# Altium PCB PowerDistribution.PcbDoc (part 2 of 3)
Units mm, origin at the board's own origin, x right, y up, seen from the top; angles counter-clockwise.
Board outline 120 x 100 mm, 4 copper layers (Component Side, Ground, Power, Solder Side), stack 0.844 mm thick; 193 components, 120 nets, 734 pads, 6 vias.
Unrouted connection lines stored in the file: 508.
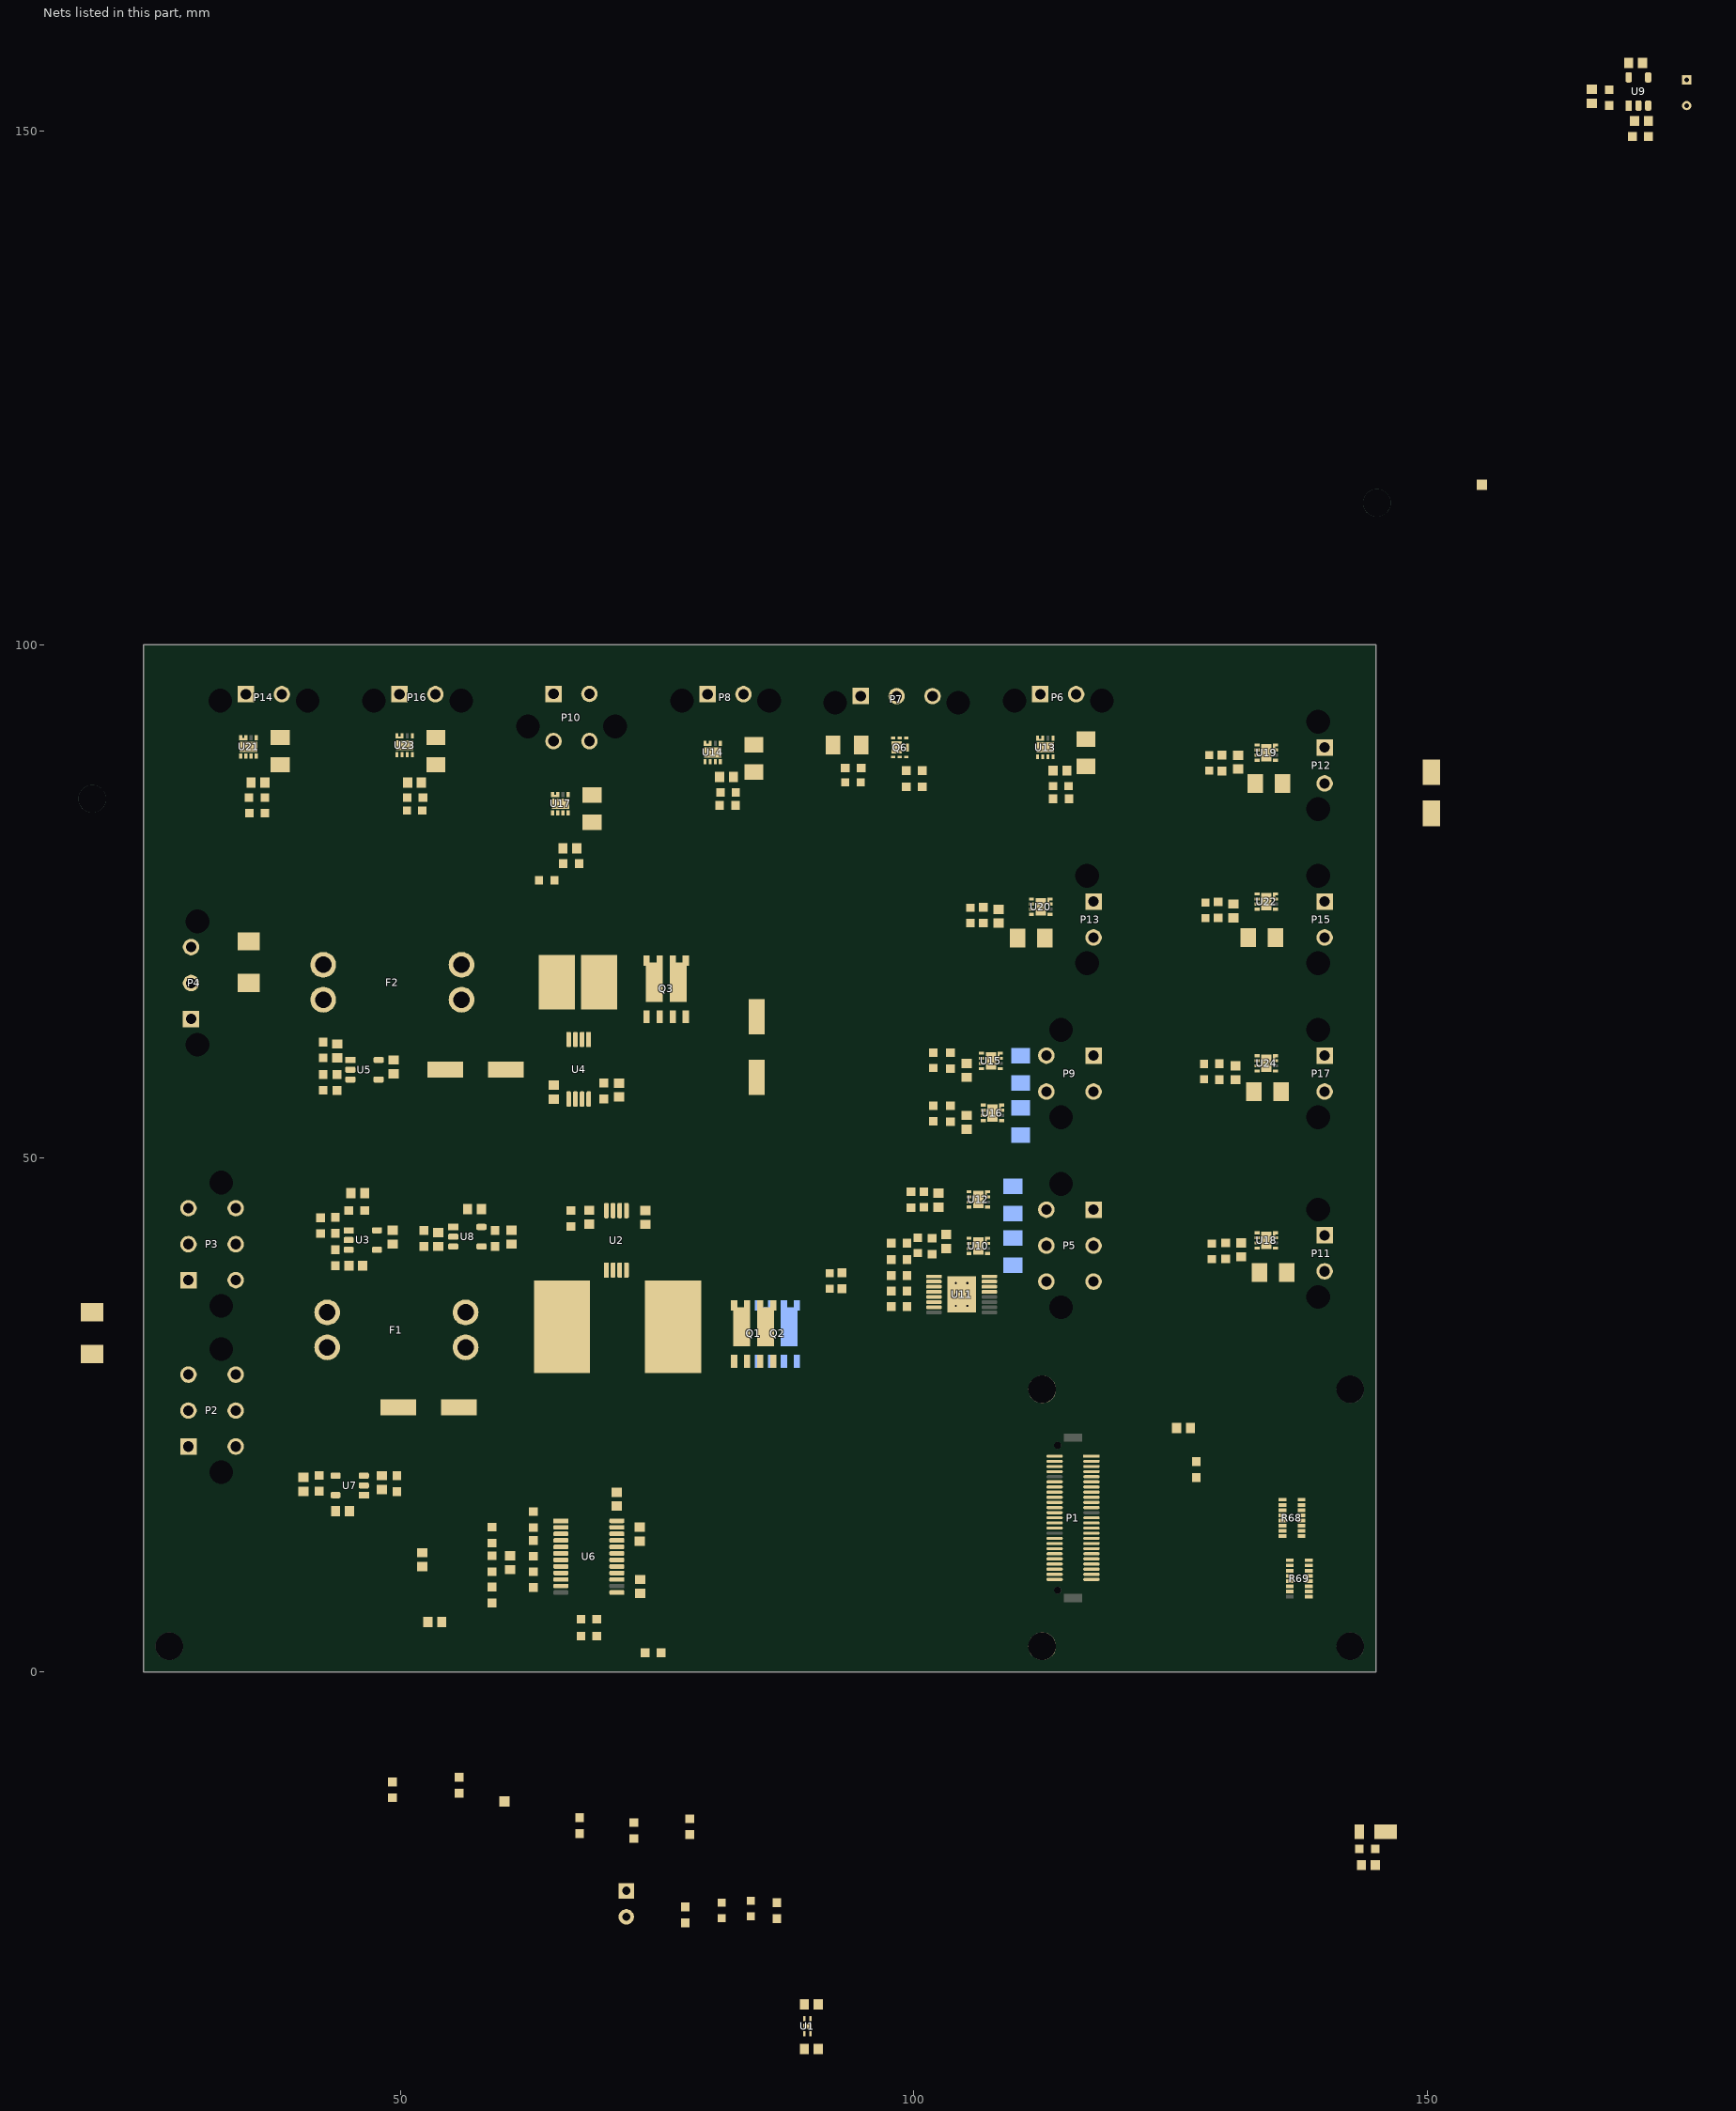
[diagram p2: the nets of this part, all layers, seen from the top]

## Part data (continued)
C17: library part "CAP CER 0.068UF 10% 50V X7R 0603", "0.068µF 50V Ceramic Capacitor X7R 0603 (1608 Metric) 0.063\" L x 0.032\" W (1.60mm x 0.80mm)", Case/Package=0603, Case Code (Metric)=1608, Dielectric=X7R, Manufacturer=Murata, Manufacturer Part Number=GCM188R71H683KA57D, Max Operating Temperature=125°C, Min Operating Temperature=-55°C, Package Quantity=4000, Supplier Part Number 1=490-8027-1-ND, Tolerance=10%, Voltage Rating=50V, Capacitance=68nF, Case Code (Imperial)=0603, ComponentLink1Description=https://datasheet.ciiva.com/29542/s0717e-29542427.pdf, ComponentLink1URL=https://datasheet.ciiva.com/29542/s0717e-29542427.pdf, ComponentLink2Description=https://datasheet.ciiva.com/29542/s0717e-29542428.pdf, ComponentLink2URL=https://datasheet.ciiva.com/29542/s0717e-29542428.pdf, ComponentLink3Description=https://datasheet.ciiva.com/29542/s0717e-29542429.pdf, ComponentLink3URL=https://datasheet.ciiva.com/29542/s0717e-29542429.pdf, Depth=0.8mm, Height=0.8mm, Length=1.6mm, Mount="Surface Mount", Packaging="Tape and Reel", Pricing 1="1=0.16, 10=0.116, 100=0.0547, 500=0.03832, 1000=0.03172 (USD)", Radiation Hardening=No, Stock 1=40000, Supplier 1=Digi-Key, Termination=SMD/SMT, Thickness=0.035inch, Voltage Rating (DC)=50V, Width=0.031inch
C18: library part "CAP ALUM 100UF 20% 35V SMD", "100µF 35V Aluminum Electrolytic Capacitors Radial, Can - SMD 2000 Hrs @ 85°C", Capacitance=100uF, Case/Package=Radial, Leakage Current=3uA, Manufacturer 1=Panasonic, Manufacturer Part Number 1=EEE-1VA101XP, Max Operating Temperature=85°C, Min Operating Temperature=-40°C, Package Quantity=900, Ripple Current=132mA, Supplier Part Number 1=PCE3951CT-ND, Tolerance=20%, Voltage=35V, ComponentLink1Description=https://datasheet.ciiva.com/46378/aba0000ce2-46378341.pdf, ComponentLink1URL=https://datasheet.ciiva.com/46378/aba0000ce2-46378341.pdf, ComponentLink2Description=https://datasheet.ciiva.com/17535/aba0000ce2-17535510.pdf, ComponentLink2URL=https://datasheet.ciiva.com/17535/aba0000ce2-17535510.pdf, ComponentLink3Description=https://datasheet.ciiva.com/30170/11aba0000ce2-30170103.pdf, ComponentLink3URL=https://datasheet.ciiva.com/30170/11aba0000ce2-30170103.pdf, ComponentLink4Description=https://datasheet.ciiva.com/31414/aba0000ce2-31414696.pdf, ComponentLink4URL=https://datasheet.ciiva.com/31414/aba0000ce2-31414696.pdf, ComponentLink5Description=https://datasheet.ciiva.com/24068/aba0000ce2-40801-24068089.pdf, ComponentLink5URL=https://datasheet.ciiva.com/24068/aba0000ce2-40801-24068089.pdf, ComponentLink6Description=https://datasheet.ciiva.com/14591/70255710-14591771.pdf, ComponentLink6URL=https://datasheet.ciiva.com/14591/70255710-14591771.pdf, ComponentLink7Description=https://datasheet.ciiva.com/14600/70255710-14600731.pdf, ComponentLink7URL=https://datasheet.ciiva.com/14600/70255710-14600731.pdf, ComponentLink8Description=https://datasheet.ciiva.com/46374/aba0000ce2-46374427.pdf, ComponentLink8URL=https://datasheet.ciiva.com/46374/aba0000ce2-46374427.pdf, ComponentLink9Description=https://datasheet.ciiva.com/11673/aba0000ce2-11673887.pdf, ComponentLink9URL=https://datasheet.ciiva.com/11673/aba0000ce2-11673887.pdf, Contact Plating=Tin, Description 1="Cap Aluminum Lytic 100uF 35V 20% (6.3 X 7.7mm) SMD 132mA 2000h 85C Automotive T/R", Diameter=6.3mm, Height=7.7mm, Height - Seated (Max)=0.303inch, Lead Free="Lead Free", Length=8mm, Life (Hours)=2000Hour, Mount="Surface Mount,PCB", Number of Pins=8, Packaging="Tape and Reel", Polarity=Polar, Pricing 1="1=0.44, 10=0.304, 100=0.1822 (USD)", Radiation Hardening=No, REACH SVHC="No SVHC", Ripple Current (AC)=132mA, Stock 1=170823, Supplier 1=Digi-Key, Termination=SMD/SMT, Voltage Rating=35V, Voltage Rating (DC)=35V
C22: "0.022µF ±10% 50V Ceramic Capacitor X7R 0603 (1608 Metric)", Manufacturer 1="Murata Electronics North America", Manufacturer Part Number 1=GRM188R71H223KA01D, Operating Temperature="-55°C ~ 125°C", Package / Case="0603 (1608 Metric)", Ratings=-, Supplier Part Number 1=490-1517-1-ND, Temperature Coefficient=X7R, Tolerance=±10%, Voltage - Rated=50V, Applications="General Purpose", Category=Capacitors, ComponentLink1Description=http://search.murata.co.jp/Ceramy/image/img/A01X/G101/ENG/GRM188R71H223KA01-01.pdf, ComponentLink1URL=http://search.murata.co.jp/Ceramy/image/img/A01X/G101/ENG/GRM188R71H223KA01-01.pdf, Description 1="CAP CER 0.022UF 50V X7R 0603", Features=-, Height - Seated (Max)=-, Lead Spacing=-, Lead Style=-, Mounting Type="Surface Mount, MLCC", Packaging="Cut Tape (CT)", Part Status=Active, Pricing 1="1=0.15, 10=0.111, 100=0.0499, 500=0.03564, 1000=0.02801 (CAD)", RoHS="RoHS Compliant", Size / Dimension="0.063\" L x 0.032\" W (1.60mm x 0.80mm)", Stock 1=612330, Supplier 1=Digi-Key, Thickness (Max)="0.035\" (0.90mm)"
C35: "2.2µF ±20% 100V Ceramic Capacitor X7R 1206 (3216 Metric)", Capacitance=2.2µF, Manufacturer 1="Murata Electronics North America", Manufacturer Part Number 1=GRM31CR72A225MA73L, Operating Temperature="-55°C ~ 125°C", Package / Case="1206 (3216 Metric)", Ratings=-, Supplier Part Number 1=490-12773-1-ND, Temperature Coefficient=X7R, Tolerance=±20%, Voltage=100V, ComponentLink1Description=http://www.murata.com/~/media/webrenewal/support/library/catalog/products/capacitor/mlcc/c02e.ashx, ComponentLink1URL=http://www.murata.com/~/media/webrenewal/support/library/catalog/products/capacitor/mlcc/c02e.ashx, Height - Seated (Max)=-, Lead Spacing=-, Lead Style=-, Mounting Type="Surface Mount, MLCC", Packaging="Cut Tape (CT)", Part Status=Active, Size / Dimension="0.126\" L x 0.063\" W (3.20mm x 1.60mm)", Supplier 1=Digi-Key, Thickness (Max)="0.071\" (1.80mm)"
D1 D2: "TVS DIODE 15VWM 24.4VC SMB", Capacitance @ Frequency=-, Current - Peak Pulse (10/1000µs)=24.6A, Manufacturer 1="Fairchild/ON Semiconductor", Manufacturer Part Number 1=SMBJ15CA, Operating Temperature="-55°C ~ 150°C (TJ)", Package / Case="DO-214AA, SMB", Power - Peak Pulse=600W, Power Line Protection=No, Supplier Device Package="DO-214AA (SMB)", Supplier Part Number 1=SMBJ15CAFSCT-ND, Voltage - Breakdown (Min)=16.7V, Voltage - Clamping (Max) @ Ipp=24.4V, Voltage - Reverse Standoff (Typ)=15V, Applications="General Purpose", Category="Circuit Protection", ComponentLink1Description=https://www.fairchildsemi.com/datasheets/SM/SMBJ10CA.pdf, ComponentLink1URL=https://www.fairchildsemi.com/datasheets/SM/SMBJ10CA.pdf, Description 1="TVS DIODE 15VWM 24.4VC SMB", Mounting Type="Surface Mount", Packaging="Cut Tape (CT)", Part Status=Active, Pricing 1="1=0.54, 10=0.444, 100=0.3027, 500=0.22704, 1000=0.17028 (CAD)", RoHS="RoHS Compliant", Stock 1=24965, Supplier 1=Digi-Key, Type=Zener
D3: "Diode Schottky 30V 1A Surface Mount PowerDI™ 123", Capacitance @ Vr, F="76pF @ 10V, 1MHz", Current - Average Rectified (Io)=1A, Current - Reverse Leakage @ Vr="1mA @ 30V", Manufacturer="Diodes Incorporated", Manufacturer Part Number=DFLS130L-7, Operating Temperature - Junction="-40°C ~ 125°C", Package / Case=POWERDI®123, Supplier Device Package="PowerDI™ 123", Supplier Part Number 1=DFLS130LDICT-ND, Voltage - DC Reverse (Vr) (Max)=30V, Voltage - Forward (Vf) (Max) @ If="310mV @ 1A", Category="Discrete Semiconductor Products", ComponentLink1Description=https://www.diodes.com/assets/Datasheets/ds30492.pdf, ComponentLink1URL=https://www.diodes.com/assets/Datasheets/ds30492.pdf, Diode Type=Schottky, Mounting Type="Surface Mount", Packaging="Cut Tape (CT)", Part Status=Active, Pricing 1="1=0.7, 10=0.599, 100=0.447, 500=0.35126, 1000=0.27142 (CAD)", RoHS="RoHS Compliant", Speed="Fast Recovery =< 500ns, > 200mA (Io)", Stock 1=68200, Supplier 1=Digi-Key
D4: "Diode Schottky 60V 3A Surface Mount SMA", Capacitance @ Vr, F="200pF @ 4V, 1MHz", Current - Average Rectified (Io)=3A, Current - Reverse Leakage @ Vr="500µA @ 60V", Manufacturer 1="Diodes Incorporated", Manufacturer Part Number 1=B360A-13-F, Operating Temperature - Junction="-55°C ~ 150°C", Package / Case="DO-214AC, SMA", Supplier Device Package=SMA, Supplier Part Number 1=B360A-FDICT-ND, Voltage - DC Reverse (Vr) (Max)=60V, Voltage - Forward (Vf) (Max) @ If="700mV @ 3A", ComponentLink1Description=https://www.diodes.com/assets/Datasheets/ds30891.pdf, ComponentLink1URL=https://www.diodes.com/assets/Datasheets/ds30891.pdf, Diode Type=Schottky, Mounting Type="Surface Mount", Packaging="Cut Tape (CT)", Part Status=Active, Speed="Fast Recovery =< 500ns, > 200mA (Io)", Supplier 1=Digi-Key
F1 F2: library part "FUSE ATO FUSE HOLDER", "Fuse Block 30A 500V 1 Circuit Blade PCB", Current Rating=30A, Manufacturer 1="Keystone Electronics", Manufacturer Part Number 1=3557-2, Supplier Part Number 1=36-3557-2-ND, Voltage=500V, Category="Circuit Protection", ComponentLink1Description=http://www.keyelco.com/product-pdf.cfm?p=296, ComponentLink1URL=http://www.keyelco.com/product-pdf.cfm?p=296, Contact Finish="Tin Nickel", Contact Material=Brass, Description 1="FUSE BLOCK BLADE 500V 30A PCB", For Use With/Related Products="ATC, ATO 257, MINI 897", Fuseholder Type=Block, Fuse Size="0.43\" L x 0.15\" W x 0.64\" H (10.92mm x 3.81mm x 16.25mm)", Fuse Type=Blade, Mounting Type=PCB, Number of Circuits=1, Orientation=Vertical, Part Status=Active, Pricing 1="1=1.66, 10=1.442, 50=1.3008, 100=1.2441, 250=1.13096, 500=1.01784, 1000=1.0126, 2500=0.84861, 5000=0.81519 (CAD)", RoHS="RoHS Compliant", Stock 1=48838, Supplier 1=Digi-Key, Termination Style="PC Pin"
JP1: library part "CONN 2POS JUMPER 0.1\"", "2 Positions Header Connector Through Hole Gold", Current Rating=2A, Insulation Color=Black, Manufacturer="Omron Electronics Inc-EMC Div", Manufacturer Part Number=XG8T-0231, Material Flammability Rating="UL94 V-0", Operating Temperature="-55°C ~ 105°C", Supplier Part Number 1=XG8T-0231-ND, Voltage Rating=300V, Applications=-, Category="Connectors, Interconnects", ComponentLink1Description=http://www.omron.com/ecb/products/pdf/en-xj8.pdf, ComponentLink1URL=http://www.omron.com/ecb/products/pdf/en-xj8.pdf, Connector Type=Header, Contact Finish - Mating=Gold, Contact Finish - Post=Tin, Contact Finish Thickness - Mating="5.9µin (0.15µm)", Contact Finish Thickness - Post=-, Contact Length - Mating="0.169\" (4.30mm)", Contact Length - Post="0.118\" (3.00mm)", Contact Material="Brass, Nickel", Contact Shape=Square, Contact Type="Male Pin", Fastening Type=-, Features=-, Ingress Protection=-, Insulation Height="0.098\" (2.50mm)", Insulation Material="Polybutylene Terephthalate (PBT), Glass Filled", Mated Stacking Heights=-, Mounting Type="Through Hole", Number of Positions=2, Number of Positions Loaded=All, Number of Rows=2, Overall Contact Length="0.386\" (9.80mm)", Packaging=Bulk, Part Status=Active, Pitch - Mating=-, Pricing 1="1=0.28, 10=0.265, 100=0.183, 500=0.15484, 1000=0.12668, 5000=0.11261, 10000=0.10205 (CAD)", RoHS="RoHS Compliant", Row Spacing - Mating="0.100\"", Shrouding=Unshrouded, Stock 1=9094, Style="Board to Board or Cable", Supplier 1=Digi-Key, Termination=Solder, Type=JUMPER
LED1 LED3 LED7 LED8 LED9 LED15 LED17: "Green 572nm LED Indication - Discrete 2V 0603 (1608 Metric)", Color=Green, Current - Test=20mA, Lens Color=Colorless, Manufacturer="Wurth Electronics Inc.", Manufacturer Part Number=150060VS75000, Millicandela Rating=40mcd, Package / Case="0603 (1608 Metric)", Supplier Device Package=0603, Supplier Part Number 1=732-4980-1-ND, Voltage - Forward (Vf) (Typ)=2V, Category=Optoelectronics, ComponentLink1Description=http://katalog.we-online.de/led/datasheet/150060VS75000.pdf, ComponentLink1URL=http://katalog.we-online.de/led/datasheet/150060VS75000.pdf, Features=-, Height (Max)=0.80mm, Lens Style/Size="Rectangle with Flat Top, 1.10mm x 0.70mm", Lens Transparency=Clear, Mounting Type="Surface Mount", Packaging="Cut Tape (CT)", Part Status=Active, Pricing 1="1=0.21, 100=0.1617, 500=0.13964 (CAD)", RoHS="RoHS Compliant", Size / Dimension="1.60mm L x 0.80mm W", Stock 1=9408, Supplier 1=Digi-Key, Viewing Angle=140°, Wavelength - Dominant=570nm, Wavelength - Peak=572nm
LED2 LED4 LED5 LED6 LED10 LED11 LED12 LED13 LED14 LED16 LED18: "Yellow 590nm LED Indication - Discrete 2V 0603 (1608 Metric)", Color=Yellow, Current - Test=20mA, Lens Color=Colorless, Manufacturer="Wurth Electronics Inc.", Manufacturer Part Number=150060YS75000, Millicandela Rating=120mcd, Package / Case="0603 (1608 Metric)", Supplier Device Package=0603, Supplier Part Number 1=732-4981-1-ND, Voltage - Forward (Vf) (Typ)=2V, Category=Optoelectronics, ComponentLink1Description=http://katalog.we-online.de/led/datasheet/150060YS75000.pdf, ComponentLink1URL=http://katalog.we-online.de/led/datasheet/150060YS75000.pdf, Features=-, Height (Max)=0.80mm, Lens Style/Size="Rectangle with Flat Top, 1.10mm x 0.70mm", Lens Transparency=Clear, Mounting Type="Surface Mount", Packaging="Cut Tape (CT)", Part Status=Active, Pricing 1="1=0.21, 100=0.1617, 500=0.13964 (CAD)", RoHS="RoHS Compliant", Size / Dimension="1.60mm L x 0.80mm W", Stock 1=10523, Supplier 1=Digi-Key, Viewing Angle=140°, Wavelength - Dominant=590nm, Wavelength - Peak=595nm
P1: "50 Position Connector Plug, Outer Shroud Contacts Surface Mount Gold", Manufacturer 1="Amphenol FCI", Manufacturer Part Number 1=10132797-055100LF, Supplier Part Number 1=609-5226-1-ND, ComponentLink1Description=http://portal.fciconnect.com/Comergent//fci/drawing/10132797.pdf, ComponentLink1URL=http://portal.fciconnect.com/Comergent//fci/drawing/10132797.pdf, Connector Type="Plug, Outer Shroud Contacts", Contact Finish=Gold, Contact Finish Thickness="1µin (0.025µm)", Height Above Board="0.169\" (4.30mm)", Mated Stacking Heights=5mm, Mounting Type="Surface Mount", Number of Positions=50, Number of Rows=2, Packaging="Cut Tape (CT)", Part Status=Active, Pitch="0.020\" (0.50mm)", Series="BergStak Plug", Supplier 1=Digi-Key
P2 P3 P5: "6 Positions Header Connector 0.138\" (3.50mm) Through Hole Tin", Current Rating=-, Insulation Color=Black, Manufacturer 1="Molex, LLC", Manufacturer Part Number 1=1722991106, Material Flammability Rating="UL94 V-0", Operating Temperature="-40°C ~ 105°C", Supplier Part Number 1=WM11778-ND, Voltage=400V, ComponentLink1Description=http://www.molex.com/pdm_docs/sd/1722991106_sd.pdf, ComponentLink1URL=http://www.molex.com/pdm_docs/sd/1722991106_sd.pdf, Connector Type=Header, Contact Finish - Mating=Tin, Contact Finish - Post=Tin, Contact Finish Thickness - Mating="60µin (1.52µm)", Contact Finish Thickness - Post="60µin (1.52µm)", Contact Length - Mating=-, Contact Length - Post="0.126\" (3.20mm)", Contact Material="Copper Alloy", Contact Shape=Square, Contact Type="Male Pin", Fastening Type="Latch Holder", Ingress Protection=-, Insulation Height="0.465\" (11.80mm)", Insulation Material="Liquid Crystal Polymer (LCP)", Mated Stacking Heights=26.99mm, Mounting Type="Through Hole", Number of Positions=6, Number of Positions Loaded=All, Number of Rows=2, Overall Contact Length=-, Packaging=Tray, Part Status=Active, Pitch - Mating="0.138\" (3.50mm)", Row Spacing - Mating="0.181\" (4.60mm)", Series=ULTRAFIT, Shrouding="Shrouded - 4 Wall", Style="Board to Cable/Wire", Supplier 1=Digi-Key, Termination=Solder
P4 P7: "3 Positions Header Connector 0.138\" (3.50mm) Through Hole Tin", Current Rating=-, Insulation Color=Black, Manufacturer 1="Molex, LLC", Manufacturer Part Number 1=1722871103, Material Flammability Rating="UL94 V-0", Operating Temperature="-40°C ~ 105°C", Supplier Part Number 1=WM11702-ND, Voltage=400V, ComponentLink1Description=http://www.molex.com/pdm_docs/sd/1722871103_sd.pdf, ComponentLink1URL=http://www.molex.com/pdm_docs/sd/1722871103_sd.pdf, Connector Type=Header, Contact Finish - Mating=Tin, Contact Finish - Post=Tin, Contact Finish Thickness - Mating="60µin (1.52µm)", Contact Finish Thickness - Post="60µin (1.52µm)", Contact Length - Mating=-, Contact Length - Post="0.126\" (3.20mm)", Contact Material="Copper Alloy", Contact Shape=Square, Contact Type="Male Pin", Fastening Type="Latch Holder", Ingress Protection=-, Insulation Height="0.465\" (11.80mm)", Insulation Material="Liquid Crystal Polymer (LCP)", Mated Stacking Heights=26.99mm, Mounting Type="Through Hole", Number of Positions=3, Number of Positions Loaded=All, Number of Rows=1, Overall Contact Length=-, Packaging=Tray, Part Status=Active, Pitch - Mating="0.138\" (3.50mm)", Row Spacing - Mating=-, Series=UltraFit, Shrouding="Shrouded - 4 Wall", Style="Board to Cable/Wire", Supplier 1=Digi-Key, Termination=Solder
P6 P14 P16: "2 Positions Header, Shrouded Connector 0.138\" (3.50mm) Through Hole Gold", Current Rating=-, Insulation Color=Black, Manufacturer 1="Molex, LLC", Manufacturer Part Number 1=1722861302, Material Flammability Rating="UL94 V-0", Operating Temperature="-40°C ~ 120°C", Supplier Part Number 1=WM11673-ND, Voltage=400V, ComponentLink1Description=http://www.molex.com/pdm_docs/sd/1722861302_sd.pdf, ComponentLink1URL=http://www.molex.com/pdm_docs/sd/1722861302_sd.pdf, Connector Type=Header, Contact Finish - Mating=Gold, Contact Finish - Post=Tin, Contact Finish Thickness - Mating="30µin (0.76µm)", Contact Finish Thickness - Post="60µin (1.52µm)", Contact Length - Mating=-, Contact Length - Post="0.126\" (3.20mm)", Contact Material="Copper Alloy", Contact Shape=Square, Contact Type="Male Pin", Fastening Type="Latch Holder", Ingress Protection=-, Insulation Height="0.465\" (11.80mm)", Insulation Material="Liquid Crystal Polymer (LCP)", Mated Stacking Heights=26.99mm, Mounting Type="Through Hole", Number of Positions=2, Number of Positions Loaded=All, Number of Rows=1, Overall Contact Length=-, Packaging=Tray, Part Status=Active, Pitch - Mating="0.138\" (3.50mm)", Row Spacing - Mating=-, Series=UltraFit, Shrouding="Shrouded - 4 Wall", Style="Board to Board or Cable", Supplier 1=Digi-Key, Termination="Kinked Pin, Solder"
P8 P11 P12 P13 P15 P17: "2 Positions Header, Shrouded Connector 0.138\" (3.50mm) Through Hole", Color=White, Current Rating=-, Insulation Color=Natural, Manufacturer 1="Molex, LLC", Manufacturer Part Number 1=1722872102, Material Flammability Rating="UL94 V-0", Operating Temperature="-40°C ~ 105°C", Supplier Part Number 1=WM11722-ND, Voltage=400V, ComponentLink1Description=http://www.molex.com/pdm_docs/sd/1722872102_sd.pdf, ComponentLink1URL=http://www.molex.com/pdm_docs/sd/1722872102_sd.pdf, Connector Type=Header, Contact Finish - Mating=Tin, Contact Finish - Post=Tin, Contact Finish Thickness - Mating="60µin (1.52µm)", Contact Finish Thickness - Post="60µin (1.52µm)", Contact Length - Mating=-, Contact Length - Post="0.126\" (3.20mm)", Contact Material="Copper Alloy", Contact Shape=Square, Contact Type="Male Pin", Fastening Type="Latch Holder", Ingress Protection=-, Insulation Height="0.465\" (11.80mm)", Insulation Material="Liquid Crystal Polymer (LCP)", Mated Stacking Heights=26.99mm, Mounting Type="Through Hole", Number of Positions=2, Number of Positions Loaded=All, Number of Rows=1, Overall Contact Length=-, Packaging=Tray, Part Status=Active, Pitch - Mating="0.138\" (3.50mm)", Row Spacing - Mating=-, Series=UltraFit, Shrouding="Shrouded - 4 Wall", Style="Board to Cable/Wire", Supplier 1=Digi-Key, Termination=Solder
P9 P10: library part "CONN 4POS 2 ROW ULTRA-FIT 0.138\"", "Connector Header Through Hole 4 position 0.138\" (3.50mm)", Colour=Black, Manufacturer 1=Molex, Manufacturer Part Number 1=1722991104, Supplier Part Number 1=WM11777-ND, ComponentLink1Description=http://www.literature.molex.com/SQLImages/kelmscott/Molex/PDF_Images/987651-1008.pdf, ComponentLink1URL=http://www.literature.molex.com/SQLImages/kelmscott/Molex/PDF_Images/987651-1008.pdf, Connector Type="Male Pin", Contact Plating=Tin, Description 1="ULTRA-FIT HDR VT DUAL F BLK 04CKT TIN", Fastening Type=Latch, Mount="Through Hole", Number of Positions=4, Number of Rows=2, Packaging=Tray, Pitch=0.138inch, Pricing 1="1=0.86, 10=0.753, 100=0.6494, 500=0.53136, 1000=0.47232, 5000=0.41328, 10000=0.39262 (USD)", Row Spacing=0.181inch, Stock 1=958, Supplier 1=Digi-Key, Termination=Solder
Q1 Q2 Q3: "Mosfet Array 2 P-Channel (Dual) 30V 60A 46W Surface Mount PowerPAK® SO-8 Dual", Current - Continuous Drain (Id) @ 25°C=60A, Drain to Source Voltage (Vdss)=30V, Input Capacitance (Ciss) (Max) @ Vds="6200pF @ 15V", Manufacturer 1="Vishay Siliconix", Manufacturer Part Number 1=SI7997DP-T1-GE3, Operating Temperature="-55°C ~ 150°C (TJ)", Package / Case="PowerPAK® SO-8 Dual", Power - Max=46W, Supplier Part Number 1=SI7997DP-T1-GE3CT-ND, Category="Discrete Semiconductor Products", ComponentLink1Description=http://www.vishay.com/docs/66719/si7997dp.pdf, ComponentLink1URL=http://www.vishay.com/docs/66719/si7997dp.pdf, Description 1="MOSFET 2P-CH 30V 60A PPAK SO-8", FET Feature=Standard, FET Type="2 P-Channel (Dual)", Gate Charge (Qg) (Max) @ Vgs="160nC @ 10V", Mounting Type="Surface Mount", Packaging="Cut Tape (CT)", Part Status=Active, Pricing 1="1=3.34, 10=3.004, 25=2.834, 100=2.4145, 250=2.2672, 500=1.98378, 1000=1.64369 (CAD)", Rds On (Max) @ Id, Vgs="5.5 mOhm @ 20A, 10V", RoHS="RoHS Compliant", Stock 1=2272, Supplier 1=Digi-Key, Supplier Device Package="PowerPAK® SO-8 Dual", Vgs(th) (Max) @ Id="2.2V @ 250µA"
Q6: Current - Continuous Drain (Id) @ 25°C=8.7A, Drain to Source Voltage (Vdss)=30V, Drive Voltage (Max Rds On,  Min Rds On)="2.5V, 4.5V", Input Capacitance (Ciss) (Max) @ Vds="1019pF @ 25V", Manufacturer 1="Infineon Technologies", Manufacturer Part Number 1=IRLHS6342TRPBF, Operating Temperature="-55°C ~ 150°C (TJ)", Package / Case=6-PowerVDFN, Power Dissipation (Max)=2.1W, Supplier Device Package="6-PQFN (2x2)", Supplier Part Number 1=IRLHS6342TRPBFCT-ND, Category="Discrete Semiconductor Products", ComponentLink1Description=http://www.infineon.com/dgdl/irlhs6342pbf.pdf?fileId=5546d462533600a401535663b52625ad, ComponentLink1URL=http://www.infineon.com/dgdl/irlhs6342pbf.pdf?fileId=5546d462533600a401535663b52625ad, Description 1="MOSFET N-CH 30V 8.7A 2X2 PQFN", FET Feature=-, FET Type=N-Channel, Gate Charge (Qg) (Max) @ Vgs="11nC @ 4.5V", Mounting Type="Surface Mount", Packaging="Cut Tape (CT)", Part Status=Active, Pricing 1="1=0.79, 10=0.685, 100=0.5118, 500=0.4022, 1000=0.31079 (CAD)", Rds On (Max) @ Id, Vgs="15.5 mOhm @ 8.5A, 4.5V", RoHS="RoHS Compliant", Stock 1=9984, Supplier 1=Digi-Key, Technology="MOSFET (Metal Oxide)", Vgs (Max)=±12V, Vgs(th) (Max) @ Id="1.1V @ 10µA"
R1 R2: "4.7k Ohm ±1% 0.1W, 1/10W Chip Resistor 0603 (1608 Metric) Moisture Resistant Thick Film", Manufacturer 1=Yageo, Manufacturer Part Number 1=RC0603FR-074K7L, Operating Temperature="-55°C ~ 155°C", Package / Case="0603 (1608 Metric)", Power (Watts)=1/10W, Resistance (Ohms)=4.7k, Supplier Device Package=0603, Supplier Part Number 1=311-4.70KHRCT-ND, Temperature Coefficient=±100ppm/°C, Tolerance=±1%, Category=Resistors, ComponentLink1Description=http://www.yageo.com/documents/recent/PYu-RC_Group_51_RoHS_L_7.pdf, ComponentLink1URL=http://www.yageo.com/documents/recent/PYu-RC_Group_51_RoHS_L_7.pdf, Composition="Thick Film", Description 1="RES SMD 4.7K OHM 1% 1/10W 0603", Failure Rate=-, Features="Moisture Resistant", Height - Seated (Max)="0.022\" (0.55mm)", Packaging="Cut Tape (CT)", Part Status=Active, Pricing 1="1=0.16, 10=0.022, 100=0.0089, 1000=0.00402, 2500=0.00349 (CAD)", RoHS="RoHS Compliant", Size / Dimension="0.063\" L x 0.031\" W (1.60mm x 0.80mm)", Stock 1=3487566, Supplier 1=Digi-Key
R3: "4 mOhms ±1% 7W Chip Resistor Nonstandard Automotive AEC-Q200, Current Sense, Moisture Resistant Metal Element", Case/Package=5931, Manufacturer 1=Yageo, Manufacturer Part Number 1=PU5931FKMP70R004L, Max Operating Temperature=170°C, Max Power Dissipation=7W, Min Operating Temperature=-65°C, Resistance=4mR, Supplier Part Number 1=YAG4096CT-ND, Temperature Coefficient=75ppm/°C, Tolerance=1%, ComponentLink1Description=http://www.yageo.com/documents/recent/PYu-PU_51_RoHS_L_3.pdf, ComponentLink1URL=http://www.yageo.com/documents/recent/PYu-PU_51_RoHS_L_3.pdf, Composition="Metal Element", Description 1="RES SMD 0.004 OHM 1% 7W 5931", Height=0.015inch, Length=0.591inch, Number of Terminations=2, Packaging="Cut Tape", Pricing 1="1=2.06, 10=1.823, 25=1.6904, 50=1.5912, 100=1.3922, 250=1.19336, 500=0.99446 (USD)", Stock 1=1097, Supplier 1=Digi-Key, Width=0.305inch
R4 R6 R10 R12 R25 R26 R29: "100 Ohm ±1% 0.1W, 1/10W Chip Resistor 0603 (1608 Metric) Moisture Resistant Thick Film", Manufacturer 1=Yageo, Manufacturer Part Number 1=RC0603FR-07100RL, Operating Temperature="-55°C ~ 155°C", Package / Case="0603 (1608 Metric)", Power=1/10W, Resistance=100, Supplier Device Package=0603, Supplier Part Number 1=311-100HRCT-ND, Temperature Coefficient=±100ppm/°C, Tolerance=±1%, ComponentLink1Description=http://www.yageo.com/documents/recent/PYu-RC_Group_51_RoHS_L_7.pdf, ComponentLink1URL=http://www.yageo.com/documents/recent/PYu-RC_Group_51_RoHS_L_7.pdf, Composition="Thick Film", Failure Rate=-, Height - Seated (Max)="0.022\" (0.55mm)", Packaging="Cut Tape (CT)", Part Status=Active, Size / Dimension="0.063\" L x 0.031\" W (1.60mm x 0.80mm)", Supplier 1=Digi-Key
R5: "RES SMD 470K OHM 1% 1/4W 0603", Manufacturer 1="Panasonic Electronic Components", Manufacturer Part Number 1=ERJ-PA3F4703V, Operating Temperature="-55°C ~ 155°C", Package / Case="0603 (1608 Metric)", Resistance=470k, Supplier Device Package=0603, Supplier Part Number 1=P470KBYCT-ND, Temperature Coefficient=±100ppm/°C, Tolerance=±1%, ComponentLink1Description=https://industrial.panasonic.com/cdbs/www-data/pdf/RDO0000/AOA0000C291.pdf, ComponentLink1URL=https://industrial.panasonic.com/cdbs/www-data/pdf/RDO0000/AOA0000C291.pdf, Composition="Thick Film", Failure Rate=-, Height - Seated (Max)="0.022\" (0.55mm)", Packaging="Cut Tape (CT)", Part Status=Active, Size / Dimension="0.063\" L x 0.031\" W (1.60mm x 0.80mm)", Supplier 1=Digi-Key
R7 R13: "RES SMD 100K OHM 5% 1/10W 0603", Manufacturer 1=Yageo, Manufacturer Part Number 1=RC0603JR-07100KL, Operating Temperature="-55°C ~ 155°C", Package / Case="0603 (1608 Metric)", Power=1/10W, Resistance=100k, Supplier Device Package=0603, Supplier Part Number 1=311-100KGRCT-ND, Temperature Coefficient=±100ppm/°C, Tolerance=±5%, ComponentLink1Description=http://www.yageo.com/documents/recent/PYu-RC_Group_51_RoHS_L_7.pdf, ComponentLink1URL=http://www.yageo.com/documents/recent/PYu-RC_Group_51_RoHS_L_7.pdf, Composition="Thick Film", Failure Rate=-, Height - Seated (Max)="0.022\" (0.55mm)", Packaging="Cut Tape (CT)", Part Status=Active, Size / Dimension="0.063\" L x 0.031\" W (1.60mm x 0.80mm)", Supplier 1=Digi-Key
R8 R14 R17 R27 R28 R30 R32 R33 R34 R36 R37 R38 R40 R42 R43 R46 R47 R49 R51 R53 R56 R57 R59 R62 R63 R66 R67: "RES SMD 10K OHM 1% 1/10W 0603", Manufacturer 1=Yageo, Manufacturer Part Number 1=RC0603FR-0710KL, Operating Temperature="-55°C ~ 155°C", Package / Case="0603 (1608 Metric)", Power=1/10W, Resistance=10k, Supplier Device Package=0603, Supplier Part Number 1=311-10.0KHRCT-ND, Temperature Coefficient=±100ppm/°C, Tolerance=±1%, ComponentLink1Description=http://www.yageo.com/documents/recent/PYu-RC_Group_51_RoHS_L_7.pdf, ComponentLink1URL=http://www.yageo.com/documents/recent/PYu-RC_Group_51_RoHS_L_7.pdf, Composition="Thick Film", Failure Rate=-, Height - Seated (Max)="0.022\" (0.55mm)", Packaging="Cut Tape (CT)", Part Status=Active, Size / Dimension="0.063\" L x 0.031\" W (1.60mm x 0.80mm)", Supplier 1=Digi-Key
R9: library part "RES 0.015 OHM 1% 7W 2818", "15 mOhms ±1% 7W Chip Resistor Nonstandard Automotive AEC-Q200, Current Sense, Moisture Resistant, Pulse Withstanding Metal Element", ComponentLink1Description=http://www.mouser.com/ds/2/427/wshm2818-469484.pdf, ComponentLink1URL=http://www.mouser.com/ds/2/427/wshm2818-469484.pdf, ComponentLink2Description=http://www.vishay.com/docs/49536/_wshm2818_vmn-pt0284.pdf, ComponentLink2URL=http://www.vishay.com/docs/49536/_wshm2818_vmn-pt0284.pdf, ComponentLink3Description=http://www.vishay.com/docs/30188/wshm2818.pdf, ComponentLink3URL=http://www.vishay.com/docs/30188/wshm2818.pdf
R11: "RES SMD 470K OHM 1% 1/4W 0603", Manufacturer 1="Panasonic Electronic Components", Manufacturer Part Number 1=ERJ-PA3F4703V, Operating Temperature="-55°C ~ 155°C", Package / Case="0603 (1608 Metric)", Power=1/4W, Resistance=470k, Supplier Device Package=0603, Supplier Part Number 1=P470KBYCT-ND, Temperature Coefficient=±100ppm/°C, Tolerance=±1%, ComponentLink1Description=https://industrial.panasonic.com/cdbs/www-data/pdf/RDO0000/AOA0000C291.pdf, ComponentLink1URL=https://industrial.panasonic.com/cdbs/www-data/pdf/RDO0000/AOA0000C291.pdf, Composition="Thick Film", Failure Rate=-, Height - Seated (Max)="0.022\" (0.55mm)", Packaging="Cut Tape (CT)", Part Status=Active, Size / Dimension="0.063\" L x 0.031\" W (1.60mm x 0.80mm)", Supplier 1=Digi-Key
R15: library part "RES 2.21K OHM 1% 1/10W 0603", "2.21 kOhms ±1% 0.1W, 1/10W Chip Resistor 0603 (1608 Metric) Automotive AEC-Q200, Moisture Resistant Thick Film", Case/Package=0603, Case Code (Metric)=1608, Manufacturer=Yageo, Manufacturer Part Number=AC0603FR-072K21L, Max Operating Temperature=155°C, Max Power Dissipation=100mW, Min Operating Temperature=-55°C, Resistance=2.21kR, Supplier Part Number 1=YAG3586CT-ND, Temperature Coefficient=100ppm/°C, Tolerance=1%, Voltage Rating=50V, Working Voltage=75V, Case Code (Imperial)=0603, ComponentLink1Description=https://datasheet.ciiva.com/12576/pyu-ac-51-rohs-l-2-12576458.pdf, ComponentLink1URL=https://datasheet.ciiva.com/12576/pyu-ac-51-rohs-l-2-12576458.pdf, Composition="Thick Film", Height=0.022inch, Lead Free="Lead Free", Length=0.063inch, Number of Terminations=2, Packaging="Tape and Reel", Power Rating=100mW, Pricing 1="1=0.1, 10=0.029, 100=0.0117, 1000=0.00527, 2500=0.00458 (USD)", Stock 1=11020, Supplier 1=Digi-Key, Termination=SMD/SMT, Weight=7.1E-05oz, Width=0.8mm
R16 R21: "1M Ohm ±1% 0.1W, 1/10W Chip Resistor 0603 (1608 Metric) Moisture Resistant Thick Film", Manufacturer 1=Yageo, Manufacturer Part Number 1=RC0603FR-071ML, Operating Temperature="-55°C ~ 155°C", Package / Case="0603 (1608 Metric)", Resistance (Ohms)=1M, Supplier Device Package=0603, Supplier Part Number 1=311-1.00MHRCT-ND, Temperature Coefficient=±100ppm/°C, Tolerance=±1%, Category=Resistors, ComponentLink1Description=http://www.yageo.com/documents/recent/PYu-RC_Group_51_RoHS_L_7.pdf, ComponentLink1URL=http://www.yageo.com/documents/recent/PYu-RC_Group_51_RoHS_L_7.pdf, Composition="Thick Film", Description 1="RES SMD 1M OHM 1% 1/10W 0603", Failure Rate=-, Features="Moisture Resistant", Height - Seated (Max)="0.022\" (0.55mm)", Packaging="Cut Tape (CT)", Part Status=Active, Pricing 1="1=0.16, 10=0.022, 100=0.0089, 1000=0.00402, 2500=0.00349 (CAD)", RoHS="RoHS Compliant", Size / Dimension="0.063\" L x 0.031\" W (1.60mm x 0.80mm)", Stock 1=2336711, Supplier 1=Digi-Key
R18: "11.8k Ohm ±1% 0.1W, 1/10W Chip Resistor 0603 (1608 Metric) Moisture Resistant Thick Film", Manufacturer=Yageo, Manufacturer Part Number=RC0603FR-0711K8L, Operating Temperature="-55°C ~ 155°C", Package / Case="0603 (1608 Metric)", Power (Watts)=1/10W, Resistance (Ohms)=11.8k, Supplier Device Package=0603, Supplier Part Number 1=311-11.8KHRCT-ND, Temperature Coefficient=±100ppm/°C, Tolerance=±1%, Category=Resistors, ComponentLink1Description=http://www.yageo.com/documents/recent/PYu-RC_Group_51_RoHS_L_7.pdf, ComponentLink1URL=http://www.yageo.com/documents/recent/PYu-RC_Group_51_RoHS_L_7.pdf, Composition="Thick Film", Failure Rate=-, Features="Moisture Resistant", Height - Seated (Max)="0.022\" (0.55mm)", Packaging="Cut Tape (CT)", Part Status=Active, Pricing 1="1=0.16, 10=0.022, 100=0.0089, 1000=0.00402, 2500=0.00349 (CAD)", RoHS="RoHS Compliant", Size / Dimension="0.063\" L x 0.031\" W (1.60mm x 0.80mm)", Stock 1=203280, Supplier 1=Digi-Key
R19: "RES SMD 10K OHM 1% 1/10W 0603", Manufacturer 1=Yageo, Manufacturer Part Number 1=RC0603FR-0710KL, Operating Temperature="-55°C ~ 155°C", Package / Case="0603 (1608 Metric)", Resistance=10k, Supplier Device Package=0603, Supplier Part Number 1=311-10.0KHRCT-ND, Temperature Coefficient=±100ppm/°C, Tolerance=±1%, ComponentLink1Description=http://www.yageo.com/documents/recent/PYu-RC_Group_51_RoHS_L_7.pdf, ComponentLink1URL=http://www.yageo.com/documents/recent/PYu-RC_Group_51_RoHS_L_7.pdf, Composition="Thick Film", Failure Rate=-, Height - Seated (Max)="0.022\" (0.55mm)", Packaging="Cut Tape (CT)", Part Status=Active, Size / Dimension="0.063\" L x 0.031\" W (1.60mm x 0.80mm)", Supplier 1=Digi-Key
R20: "86.6k Ohm ±1% 0.1W, 1/10W Chip Resistor 0603 (1608 Metric) Automotive AEC-Q200 Thick Film", Manufacturer="Panasonic Electronic Components", Manufacturer Part Number=ERJ-3EKF8662V, Operating Temperature="-55°C ~ 155°C", Package / Case="0603 (1608 Metric)", Power (Watts)=1/10W, Resistance (Ohms)=86.6k, Supplier Device Package=0603, Supplier Part Number 1=P86.6KHCT-ND, Temperature Coefficient=±100ppm/°C, Tolerance=±1%, Category=Resistors, ComponentLink1Description=https://industrial.panasonic.com/cdbs/www-data/pdf/RDA0000/AOA0000C298.pdf, ComponentLink1URL=https://industrial.panasonic.com/cdbs/www-data/pdf/RDA0000/AOA0000C298.pdf, Composition="Thick Film", Failure Rate=-, Features="Automotive AEC-Q200", Height - Seated (Max)="0.022\" (0.55mm)", Packaging="Cut Tape (CT)", Part Status=Active, Pricing 1="1=0.16, 10=0.031, 100=0.0127, 1000=0.00567, 2500=0.00492 (CAD)", RoHS="RoHS Compliant", Size / Dimension="0.063\" L x 0.031\" W (1.60mm x 0.80mm)", Stock 1=64161, Supplier 1=Digi-Key
R22: "54.9k Ohm ±1% 0.1W, 1/10W Chip Resistor 0603 (1608 Metric) Automotive AEC-Q200 Thick Film", Manufacturer="Panasonic Electronic Components", Manufacturer Part Number=ERJ-3EKF5492V, Operating Temperature="-55°C ~ 155°C", Package / Case="0603 (1608 Metric)", Power (Watts)=1/10W, Resistance (Ohms)=54.9k, Supplier Device Package=0603, Supplier Part Number 1=P54.9KHCT-ND, Temperature Coefficient=±100ppm/°C, Tolerance=±1%, Category=Resistors, ComponentLink1Description=https://industrial.panasonic.com/cdbs/www-data/pdf/RDA0000/AOA0000C298.pdf, ComponentLink1URL=https://industrial.panasonic.com/cdbs/www-data/pdf/RDA0000/AOA0000C298.pdf, Composition="Thick Film", Failure Rate=-, Features="Automotive AEC-Q200", Height - Seated (Max)="0.022\" (0.55mm)", Packaging="Cut Tape (CT)", Part Status=Active, Pricing 1="1=0.16, 10=0.031, 100=0.0127, 1000=0.00567, 2500=0.00492 (CAD)", RoHS="RoHS Compliant", Size / Dimension="0.063\" L x 0.031\" W (1.60mm x 0.80mm)", Stock 1=74038, Supplier 1=Digi-Key
R23: "78.7k Ohm ±1% 0.1W, 1/10W Chip Resistor 0603 (1608 Metric) Automotive AEC-Q200 Thick Film", Manufacturer="Panasonic Electronic Components", Manufacturer Part Number=ERJ-3EKF7872V, Operating Temperature="-55°C ~ 155°C", Package / Case="0603 (1608 Metric)", Power (Watts)=1/10W, Resistance (Ohms)=78.7k, Supplier Device Package=0603, Supplier Part Number 1=P78.7KHCT-ND, Temperature Coefficient=±100ppm/°C, Tolerance=±1%, Category=Resistors, ComponentLink1Description=https://industrial.panasonic.com/cdbs/www-data/pdf/RDA0000/AOA0000C298.pdf, ComponentLink1URL=https://industrial.panasonic.com/cdbs/www-data/pdf/RDA0000/AOA0000C298.pdf, Composition="Thick Film", Failure Rate=-, Features="Automotive AEC-Q200", Height - Seated (Max)="0.022\" (0.55mm)", Packaging="Cut Tape (CT)", Part Status=Active, RoHS="RoHS Compliant", Size / Dimension="0.063\" L x 0.031\" W (1.60mm x 0.80mm)", Supplier 1=Digi-Key
R24: "255k Ohm ±1% 0.1W, 1/10W Chip Resistor 0603 (1608 Metric) Moisture Resistant Thick Film", Manufacturer 1=Yageo, Manufacturer Part Number 1=RC0603FR-07255KL, Operating Temperature="-55°C ~ 155°C", Package / Case="0603 (1608 Metric)", Power (Watts)=1/10W, Resistance (Ohms)=255k, Supplier Device Package=0603, Supplier Part Number 1=311-255KHRCT-ND, Temperature Coefficient=±100ppm/°C, Tolerance=±1%, Category=Resistors, ComponentLink1Description=http://www.yageo.com/documents/recent/PYu-RC_Group_51_RoHS_L_7.pdf, ComponentLink1URL=http://www.yageo.com/documents/recent/PYu-RC_Group_51_RoHS_L_7.pdf, Composition="Thick Film", Description 1="RES SMD 255K OHM 1% 1/10W 0603", Failure Rate=-, Features="Moisture Resistant", Height - Seated (Max)="0.022\" (0.55mm)", Packaging="Cut Tape (CT)", Part Status=Active, Pricing 1="1=0.16, 10=0.022, 100=0.0089, 1000=0.00402, 2500=0.00349 (CAD)", RoHS="RoHS Compliant", Size / Dimension="0.063\" L x 0.031\" W (1.60mm x 0.80mm)", Stock 1=106564, Supplier 1=Digi-Key
R31 R39 R41 R44 R48 R50 R52 R54 R55 R58 R60 R61 R64 R65: library part "RES 200 OHM 5% 2/3W 1206", "200 Ohms ±5% 0.667W, 2/3W Chip Resistor 1206 (3216 Metric) Automotive AEC-Q200, Pulse Withstanding Thick Film", Case/Package=1206, Case Code (Metric)=3216, Manufacturer=Panasonic, Manufacturer Part Number=ERJ-P08J201V, Max Operating Temperature=155°C, Max Power Dissipation=667mW, Min Operating Temperature=-55°C, Package Quantity=1, Power Rating=660mW, Resistance=200R, Supplier Part Number 1=P200ALCT-ND, Temperature Coefficient=200ppm/°C, Tolerance=5%, Voltage Rating=500V, Voltage Rating (DC)=200V, Case Code (Imperial)=1206, ComponentLink1Description=https://datasheet.ciiva.com/17207/aoa0000ce4-17207029.pdf, ComponentLink1URL=https://datasheet.ciiva.com/17207/aoa0000ce4-17207029.pdf, ComponentLink2Description=https://datasheet.ciiva.com/9184/aoa0000ce4-9184599.pdf, ComponentLink2URL=https://datasheet.ciiva.com/9184/aoa0000ce4-9184599.pdf, ComponentLink3Description=https://datasheet.ciiva.com/9184/aoa0000ce4-9184603.pdf, ComponentLink3URL=https://datasheet.ciiva.com/9184/aoa0000ce4-9184603.pdf, ComponentLink4Description=https://datasheet.ciiva.com/30201/aoa0000ce4-30201485.pdf, ComponentLink4URL=https://datasheet.ciiva.com/30201/aoa0000ce4-30201485.pdf, Composition="Thick Film", Contact Plating=Tin, Height=0.028inch, Lead Free="Contains Lead", Length=3.2mm, Mount="Surface Mount", Number of Terminations=2, Packaging="Tape and Reel", Pricing 1="1=0.16, 10=0.137, 100=0.0534, 1000=0.02237, 2500=0.02051 (USD)", Radiation Hardening=No, Stock 1=32165, Supplier 1=Digi-Key, Termination=SMD/SMT, Width=1.6mm
R35: library part "RES 1K OHM 5% 1/10W 0603", "1k Ohm ±5% 0.1W, 1/10W Chip Resistor 0603 (1608 Metric)", Manufacturer=Yageo, Manufacturer Part Number=RC0603JR-071KL, Operating Temperature="-55°C ~ 155°C", Package / Case="0603 (1608 Metric)", Power (Watts)="0.1W, 1/10W", Resistance (Ohms)=1k, Supplier Device Package=0603, Supplier Part Number 1=311-1.0KGRCT-ND, Temperature Coefficient=±100ppm/°C, Tolerance=±5%, Category=Resistors, ComponentLink1Description=http://www.yageo.com/documents/recent/PYu-RC_Group_51_RoHS_L_7.pdf, ComponentLink1URL=http://www.yageo.com/documents/recent/PYu-RC_Group_51_RoHS_L_7.pdf, Composition="Thick Film", Failure Rate=-, Features="Moisture Resistant", Height - Seated (Max)="0.022\" (0.55mm)", Packaging="Cut Tape (CT)", Part Status=Active, Pricing 1="1=0.15, 10=0.017, 100=0.0071, 1000=0.0032, 2500=0.00278 (CAD)", RoHS="RoHS Compliant", Size / Dimension="0.063\" L x 0.031\" W (1.60mm x 0.80mm)", Stock 1=4415240, Supplier 1=Digi-Key
R45: "22.1 Ohm ±1% 0.1W, 1/10W Chip Resistor 0603 (1608 Metric) Moisture Resistant Thick Film", Manufacturer 1=Yageo, Manufacturer Part Number 1=RC0603FR-0722R1L, Operating Temperature="-55°C ~ 155°C", Package / Case="0603 (1608 Metric)", Power=1/10W, Resistance=22.1, Supplier Device Package=0603, Supplier Part Number 1=311-22.1HRCT-ND, Temperature Coefficient=±100ppm/°C, Tolerance=±1%, ComponentLink1Description=http://www.yageo.com/documents/recent/PYu-RC_Group_51_RoHS_L_7.pdf, ComponentLink1URL=http://www.yageo.com/documents/recent/PYu-RC_Group_51_RoHS_L_7.pdf, Composition="Thick Film", Failure Rate=-, Height - Seated (Max)="0.022\" (0.55mm)", Packaging="Cut Tape (CT)", Part Status=Active, Size / Dimension="0.063\" L x 0.031\" W (1.60mm x 0.80mm)", Supplier 1=Digi-Key
R68 R69: library part "RES ARRAY 10K OHM 5% 8RES EXB-2HV103JV", "RES ARRAY SMD 10K 5% 62.5mW 1506", Manufacturer="Panasonic Electronic Components", Manufacturer_Part_Number=EXB-2HV103JV, Operating Temperature="-55°C ~ 125°C", Package / Case="1506, Convex, Long Side Terminals", Power Per Element=62.5mW, Resistance (Ohms)=10k, Supplier Device Package=1506, Supplier Part Number 1=Y1103CT-ND, Temperature Coefficient=±200ppm/°C, Tolerance=±5%, Applications="Automotive AEC-Q200", C="Copyright (C) 2015 Accelerated Designs. All rights reserved", Category=Resistors, Circuit Type=Isolated, ComponentLink1Description=https://industrial.panasonic.com/cdbs/www-data/pdf/AOC0000/AOC0000C14.pdf, ComponentLink1URL=https://industrial.panasonic.com/cdbs/www-data/pdf/AOC0000/AOC0000C14.pdf, Copyright="Copyright (C) 2015 Accelerated Designs. All rights reserved", Height - Seated (Max)="0.022\" (0.55mm)", Manufacturer Part Number=EXB-2HV103JV, Mounting Type="Surface Mount", Packaging="Cut Tape (CT)", Part Status=Active, Pricing 1="1=0.43, 10=0.373, 25=0.2712, 50=0.1964, 100=0.1456, 250=0.11176, 500=0.08806, 1000=0.06096 (CAD)", RoHS="RoHS Compliant", Size / Dimension="0.150\" L x 0.063\" W (3.80mm x 1.60mm)", Stock 1=152779, Supplier 1=Digi-Key, Vendor=Panasonic
RT1: library part "NTC THERMISTOR 10K 1% BEAD", "NTC Thermistor 10k Bead", B Value Tolerance=±1%, Manufacturer="Murata Electronics North America", Manufacturer Part Number=NXRT15XH103FA1B030, Operating Temperature="-40°C ~ 125°C", Package / Case=Bead, Resistance in Ohms @ 25°C=10k, Supplier Part Number 1=490-8601-ND, B0/50=-, B25/50=3380K, B25/75=-, B25/85=3434K, B25/100=3455K, Category="Sensors, Transducers", ComponentLink1Description=https://www.murata.com/~/media/webrenewal/support/library/catalog/products/thermistor/ntc/r44e.ashx, ComponentLink1URL=https://www.murata.com/~/media/webrenewal/support/library/catalog/products/thermistor/ntc/r44e.ashx, Length - Lead Wire=-, Mounting Type="Through Hole", Packaging=Bulk, Part Status=Active, Pricing 1="1=0.96, 5=0.91, 10=0.792, 25=0.696, 50=0.5784, 100=0.4925, 500=0.42834, 1000=0.3748, 5000=0.33197 (CAD)", Resistance Tolerance=±1%, RoHS="RoHS Compliant", Stock 1=25017, Supplier 1=Digi-Key
TP1 TP2 TP3 TP4 TP6: Case/Package=0603, Case Code (Metric)=1608, Colour=Natural, Manufacturer 1="TE Connectivity", Manufacturer Part Number 1=1625854-3, Max Operating Temperature=125°C, Min Operating Temperature=-55°C, Package Quantity=2000, Resistance=0mR, Supplier Part Number 1=A106145CT-ND, Case Code (Imperial)=0603, ComponentLink1Description=https://datasheet.ciiva.com/30100/1773266-a-30100967.pdf, ComponentLink1URL=https://datasheet.ciiva.com/30100/1773266-a-30100967.pdf, ComponentLink2Description=https://datasheet.ciiva.com/8914/eng-ds-1773266-a-8914634.pdf, ComponentLink2URL=https://datasheet.ciiva.com/8914/eng-ds-1773266-a-8914634.pdf, ComponentLink3Description=https://datasheet.ciiva.com/6439/eng-ds-1773266-a-6439163.pdf, ComponentLink3URL=https://datasheet.ciiva.com/6439/eng-ds-1773266-a-6439163.pdf, ComponentLink4Description=https://datasheet.ciiva.com/6439/eng-ds-1773266-a-6439164.pdf, ComponentLink4URL=https://datasheet.ciiva.com/6439/eng-ds-1773266-a-6439164.pdf, ComponentLink5Description=https://datasheet.ciiva.com/6439/eng-ds-1773266-a-6439165.pdf, ComponentLink5URL=https://datasheet.ciiva.com/6439/eng-ds-1773266-a-6439165.pdf, Depth=0.8mm, Description 1="Thick Film Resistors - SMD 2000", Height=1.15mm, Length=1.6mm, Military Standard=Not, Mount="Surface Mount", Packaging="Tape and Reel", Pricing 1="1=0.22, 10=0.211, 25=0.18, 50=0.1574, 100=0.1462, 250=0.12932, 500=0.12368, 1000=0.1012 (USD)", Radiation Hardening=No, Stock 1=212628, Supplier 1=Digi-Key, Termination=SMD/SMT, Width=0.8mm
U1: Current - Limit (Min)=250mA, Current - Output=200mA, Manufacturer="Microchip Technology", Manufacturer Part Number=MIC94310, Operating Temperature="-40°C ~ 125°C", Package / Case="4-UFDFN Exposed Pad", Supplier Device Package="4-TDFN (1.2x1.6)", Supplier Part Number 1=576-4761-1-ND, Voltage - Dropout (Typical)="0.04V @ 200mA", Voltage - Input="Up to 3.6V", Voltage - Output=3V, Category="Integrated Circuits (ICs)", ComponentLink1Description=http://www.microchip.com/mymicrochip/filehandler.aspx?ddocname=en580409, ComponentLink1URL=http://www.microchip.com/mymicrochip/filehandler.aspx?ddocname=en580409, Mounting Type="Surface Mount", Packaging="Cut Tape (CT)", Part Status=Active, Pricing 1="1=0.45, 25=0.3708, 100=0.3386 (CAD)", Regulator Topology="Positive Fixed", RoHS="RoHS Compliant", Stock 1=4802, Supplier 1=Digi-Key
U2: library part "IC CURRENT AMPLIFIER INA240 8-TSSOP", "Current Sense Amplifier 1 Circuit 8-TSSOP", Current - Supply=1.8mA, Manufacturer 1="Texas Instruments", Manufacturer Part Number 1=INA240A3PWR, Operating Temperature="-40°C ~ 125°C", Package / Case="8-TSSOP (0.173\", 4.40mm Width)", Supplier Device Package=8-TSSOP, Supplier Part Number 1=296-45090-1-ND, Voltage - Supply, Single/Dual (±)="2.7 V ~ 5.5 V", Amplifier Type="Current Sense", Category="Integrated Circuits (ICs)", ComponentLink1Description=http://www.ti.com/lit/ds/symlink/ina240.pdf, ComponentLink1URL=http://www.ti.com/lit/ds/symlink/ina240.pdf, Description 1="IC AMP CURRENT SENSE 8-TSSOP", Mounting Type="Surface Mount", Output Type=-, Packaging="Cut Tape (CT)", Part Status=Active, Pricing 1="1=3.79, 10=3.397, 100=2.7311, 500=2.24388, 1000=1.85921 (CAD)", RoHS="RoHS Compliant", Slew Rate="2 V/µs", Stock 1=1286, Supplier 1=Digi-Key
U3 U5 U7 U8 U9: "General Purpose Amplifier 1 Circuit Rail-to-Rail SOT-23-5", Current - Output / Channel=50mA, Current - Supply=400µA, Manufacturer 1="Texas Instruments", Manufacturer Part Number 1=TLV316QDBVRQ1, Operating Temperature="-40°C ~ 125°C", Package / Case="SC-74A, SOT-753", Supplier Device Package=SOT-23-5, Supplier Part Number 1=296-45323-1-ND, Voltage - Supply, Single/Dual (±)="1.8 V ~ 5.5 V, ±0.9 V ~ 2.75 V", -3db Bandwidth=-, Amplifier Type="General Purpose", Category="Integrated Circuits (ICs)", ComponentLink1Description=http://www.ti.com/lit/ds/symlink/tlv316-q1.pdf, ComponentLink1URL=http://www.ti.com/lit/ds/symlink/tlv316-q1.pdf, Description 1="IC OP AMP GP RR 10MHZ 5-SOT-23", Mounting Type="Surface Mount", Number of Circuits=1, Output Type=Rail-to-Rail, Packaging="Cut Tape (CT)", Part Status=Active, Pricing 1="1=1.33, 10=1.185, 100=0.9234, 500=0.76276, 1000=0.60218 (CAD)", RoHS="RoHS Compliant", Slew Rate="6 V/µs", Stock 1=1747, Supplier 1=Digi-Key
U4: library part "IC CURRENT AMPLIFIER INA240A1 20V/V 8-TSSOP", "Current Sense Amplifier 1 Circuit 8-TSSOP", Case/Package=TSSOP, Manufacturer 1="Texas Instruments", Max Operating Temperature=125°C, Min Operating Temperature=-40°C, Supplier Part Number 1=296-45088-1-ND, ComponentLink1Description=http://www.ti.com/lit/ds/symlink/ina240.pdf, ComponentLink1URL=http://www.ti.com/lit/ds/symlink/ina240.pdf, Lead Free="Lead Free", Pricing 1="1=2.65, 10=2.377, 100=1.9109, 500=1.56998, 1000=1.30084 (USD)", Stock 1=4306, Supplier 1=Digi-Key
U6: "OR Controller Source Selector Switch P-Channel 3:1 24-SSOP", Current - Output (Max)=-, Current - Supply=28µA, Manufacturer 1="Linear Technology", Manufacturer Part Number 1=LTC4417CGN#PBF, Operating Temperature="0°C ~ 70°C", Package / Case="24-SSOP (0.154\", 3.90mm Width)", Supplier Device Package=24-SSOP, Supplier Part Number 1=LTC4417CGN#PBF-ND, Voltage - Supply="2.5 V ~ 36 V", ComponentLink1Description=http://www.linear.com/docs/42408, ComponentLink1URL=http://www.linear.com/docs/42408, FET Type=P-Channel, Internal Switch(s)=No, Mounting Type="Surface Mount", Packaging=Tube, Part Status=Active, Ratio - Input:Output=3:1, Supplier 1=Digi-Key, Type="Source Selector Switch"
U10 U12 U13 U14 U15 U16 U17 U18 U19 U20 U21 U22 U23 U24: "NCP45521IMNTWG-H", Current - Output (Max)=10.5A, Manufacturer="ON Semiconductor", Operating Temperature="-40°C ~ 85°C (TA)", Package / Case="8-VFDFN Exposed Pad", Supplier Device Package="8-DFN (2x2)", Voltage - Load="0.5 V ~ 13.5 V", Voltage - Supply (Vcc/Vdd)="3 V ~ 5.5 V", Category="Integrated Circuits (ICs)", ComponentLink1Description=http://www.onsemi.com/pub/Collateral/NCP45520-D.PDF, ComponentLink1URL=http://www.onsemi.com/pub/Collateral/NCP45520-D.PDF, Fault Protection="Over Temperature, UVLO", Features="Slew Rate Controlled", Input Type=Non-Inverting, Interface=On/Off, Manufacturer Part Number=NCP45521IMNTWG-H, Number of Outputs=1, Output Configuration="High Side", Output Type=N-Channel, Packaging=Digi-Reel®, Part Status=Active, Pricing 1="1=1.57, 10=1.405, 100=1.0957, 500=0.90518, 1000=0.71462 (CAD)", Pricing 2="1=1.53, 10=1.372, 100=1.0702, 500=0.88408, 1000=0.69797 (CAD)", Ratio - Input:Output=1:1, Rds On (Typ)="12.8 mOhm", RoHS="RoHS Compliant", Stock 1=2377, Stock 2=2211, Supplier 1=Digi-Key, Supplier 2=Digi-Key, Supplier Part Number 2=NCP45521IMNTWG-HOSDKR-ND, Switch Type="General Purpose"